# Altium PCB PCB2.PcbDoc
Units mm, origin at the board's own origin, x right, y up, seen from the top; angles counter-clockwise.
Board outline 63.53 x 53.37 mm, 2 copper layers (Top Layer, Bottom Layer); 52 components, 49 nets, 157 pads, 0 vias.
Unrouted connection lines stored in the file: 1.
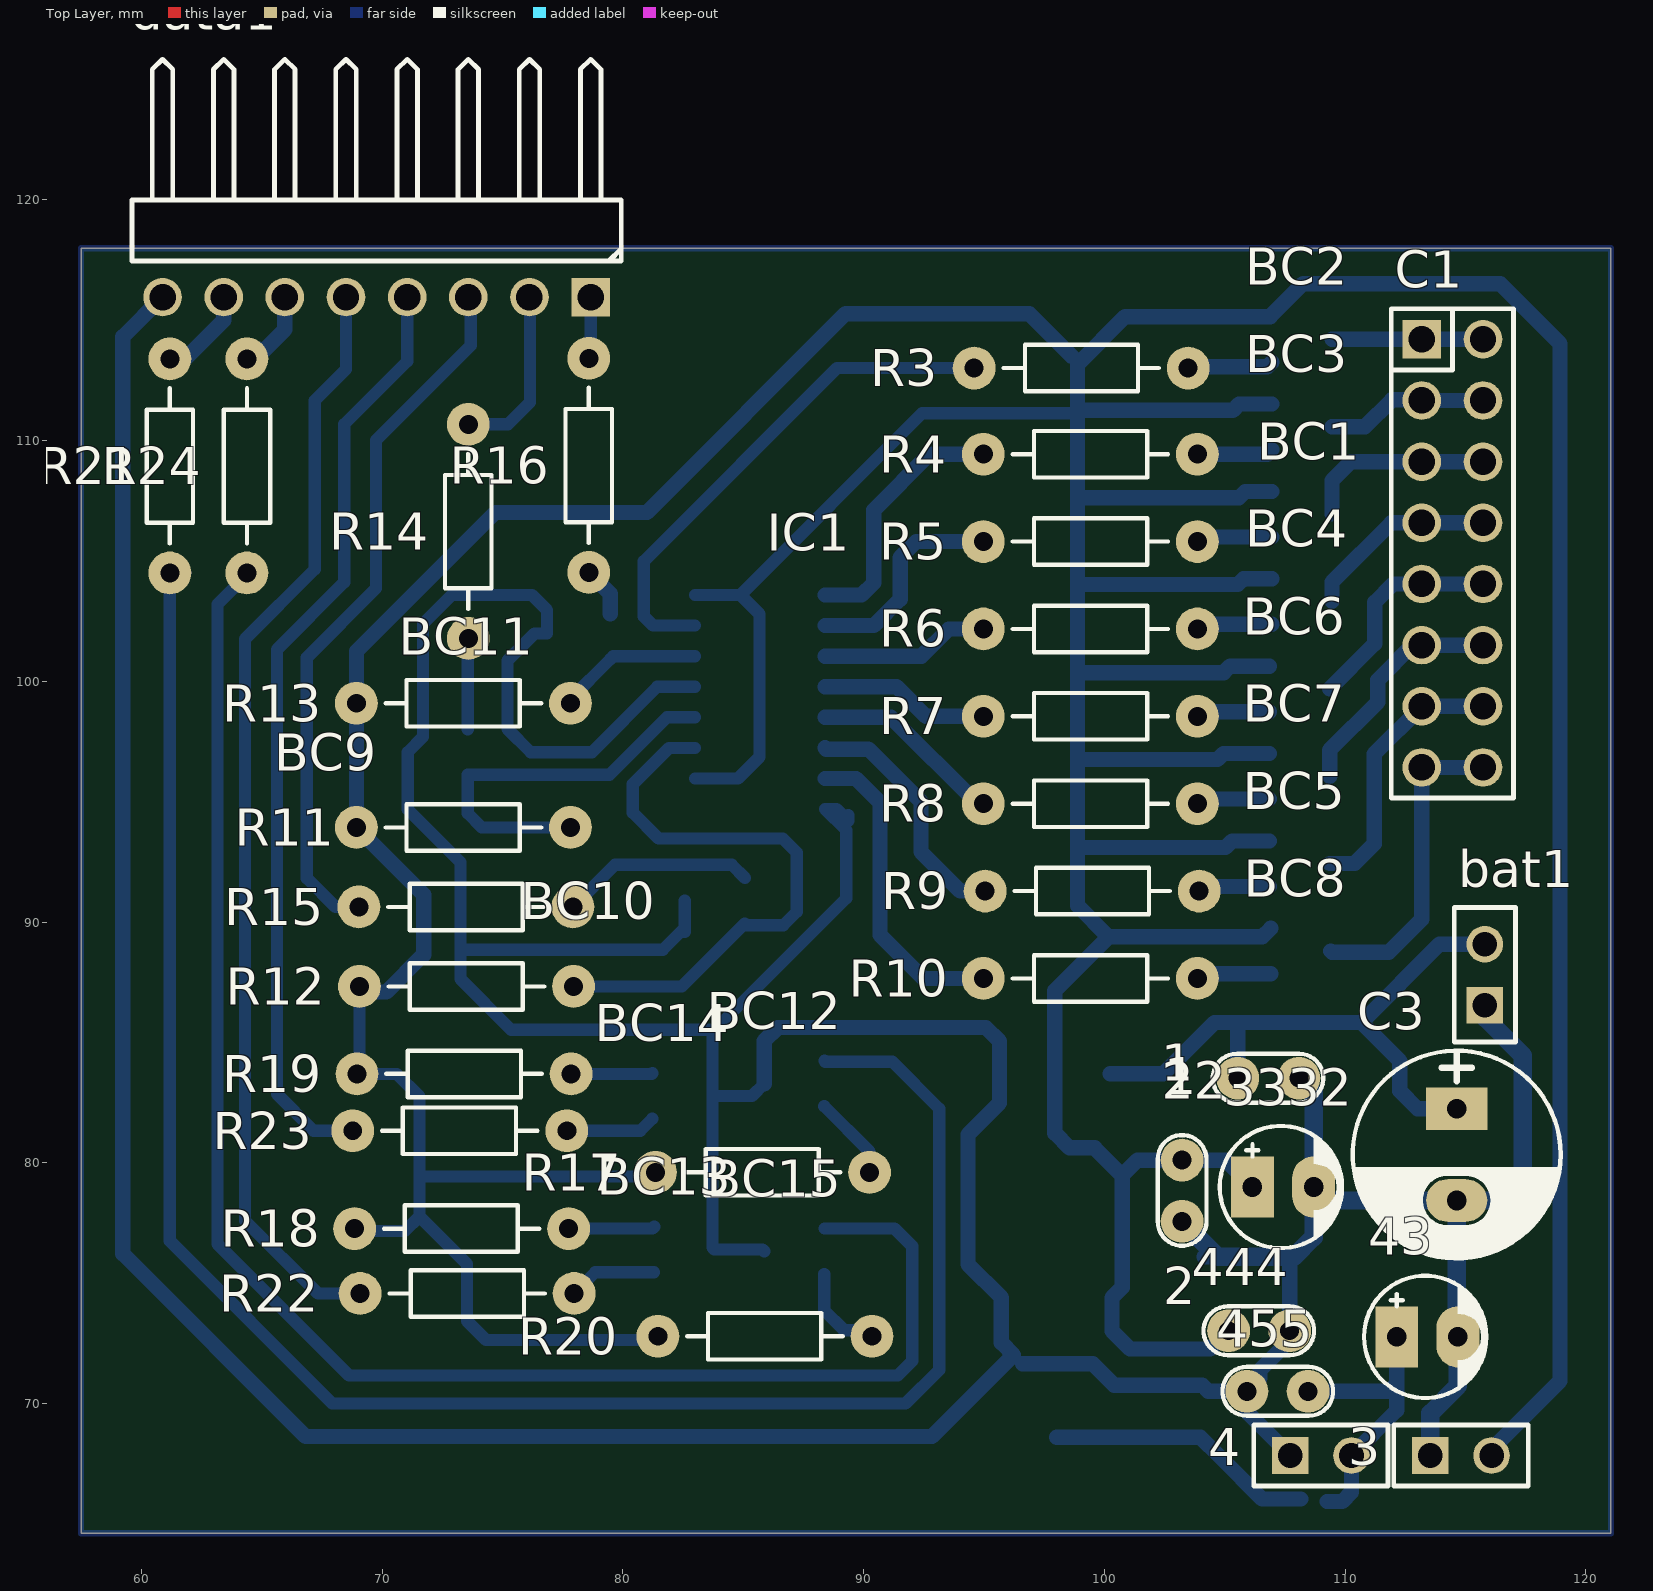
[diagram p0: Top Layer view]
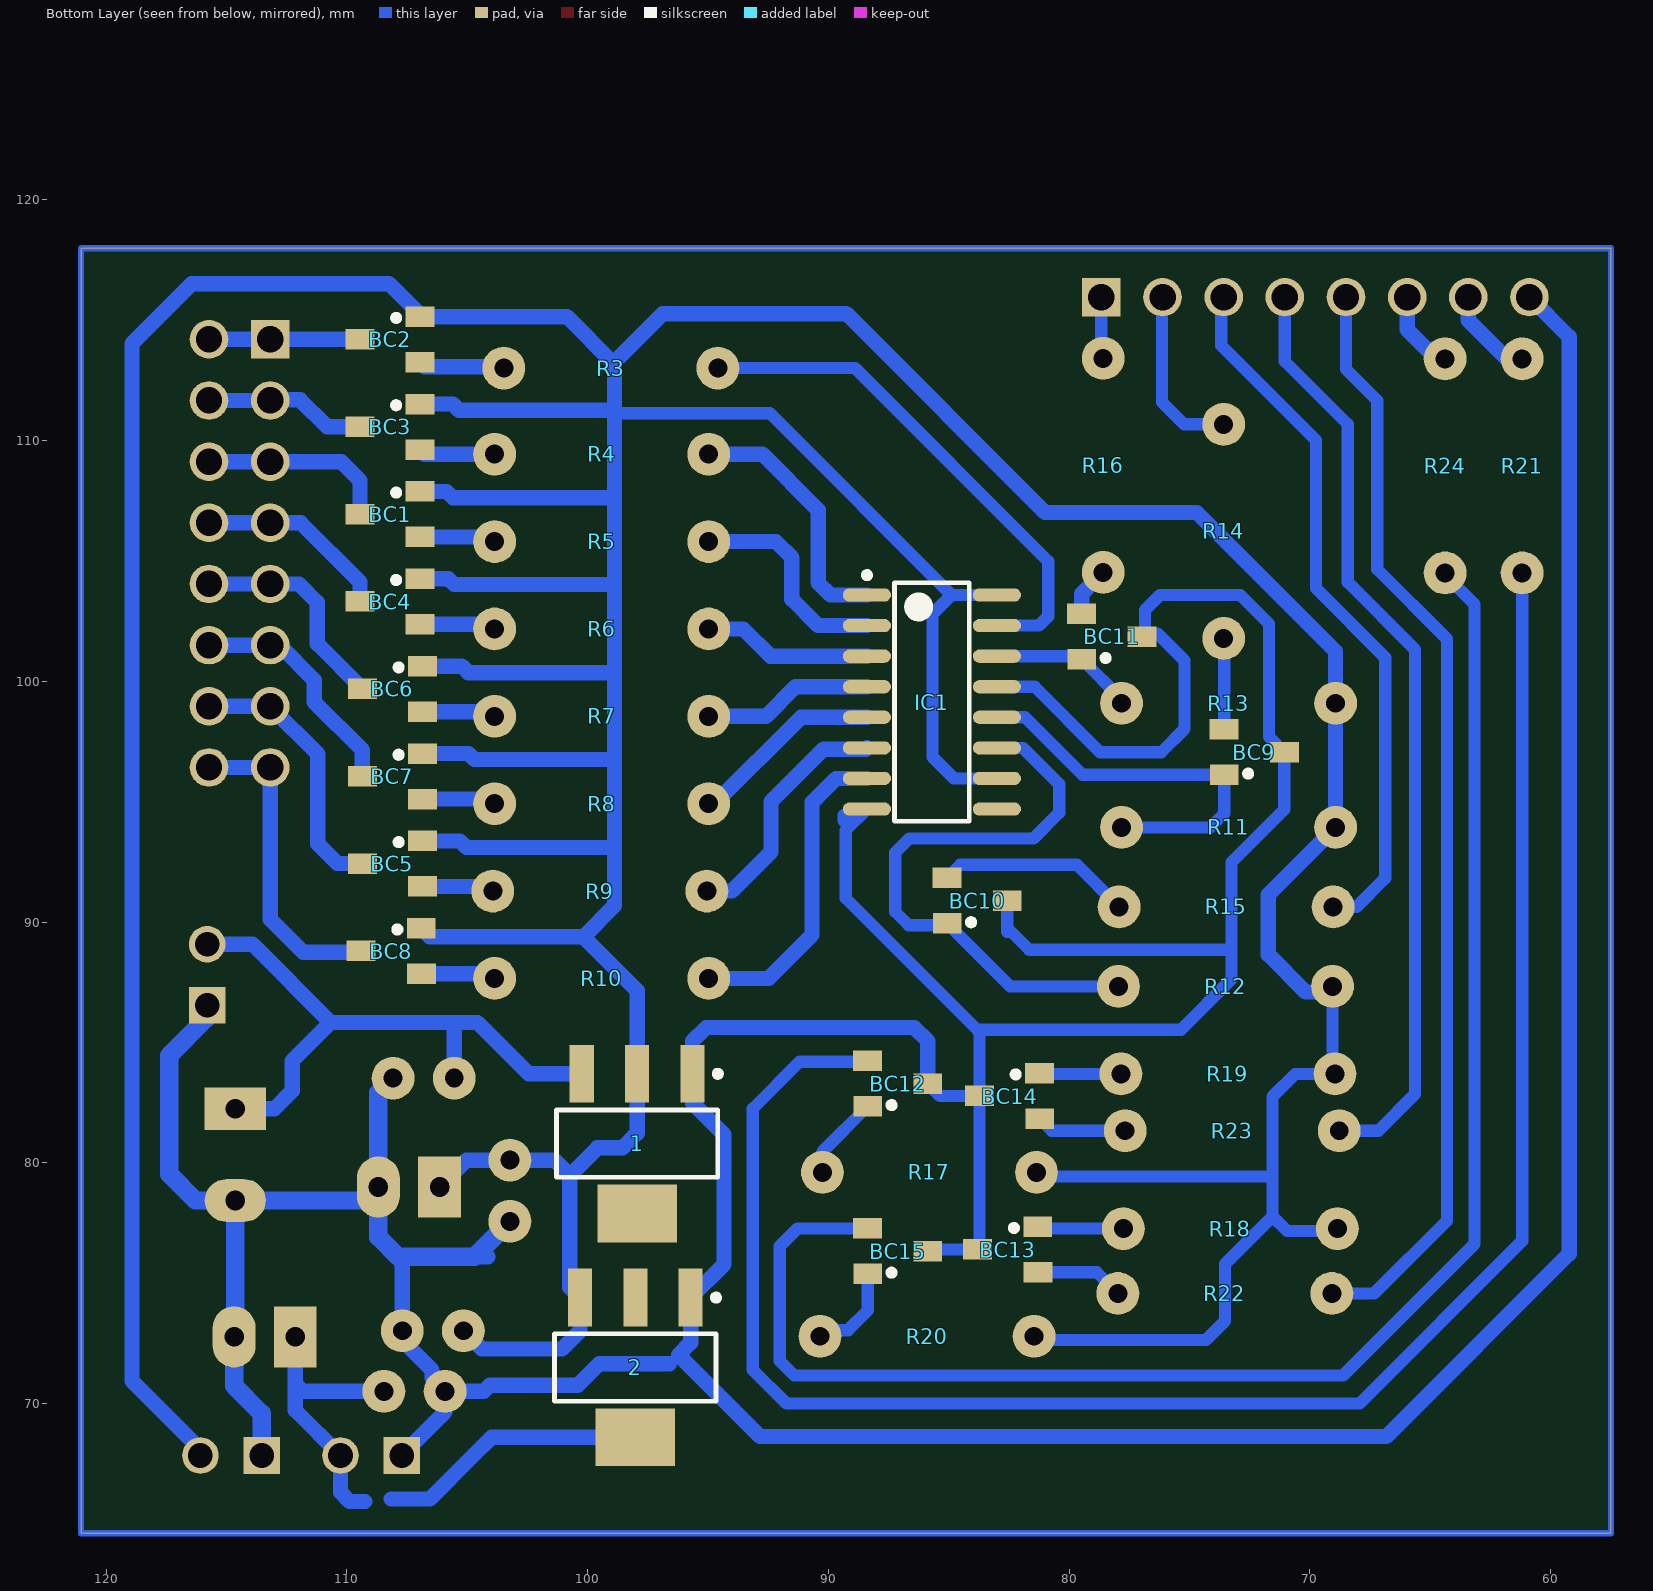
[diagram p1: Bottom Layer view, seen from below]
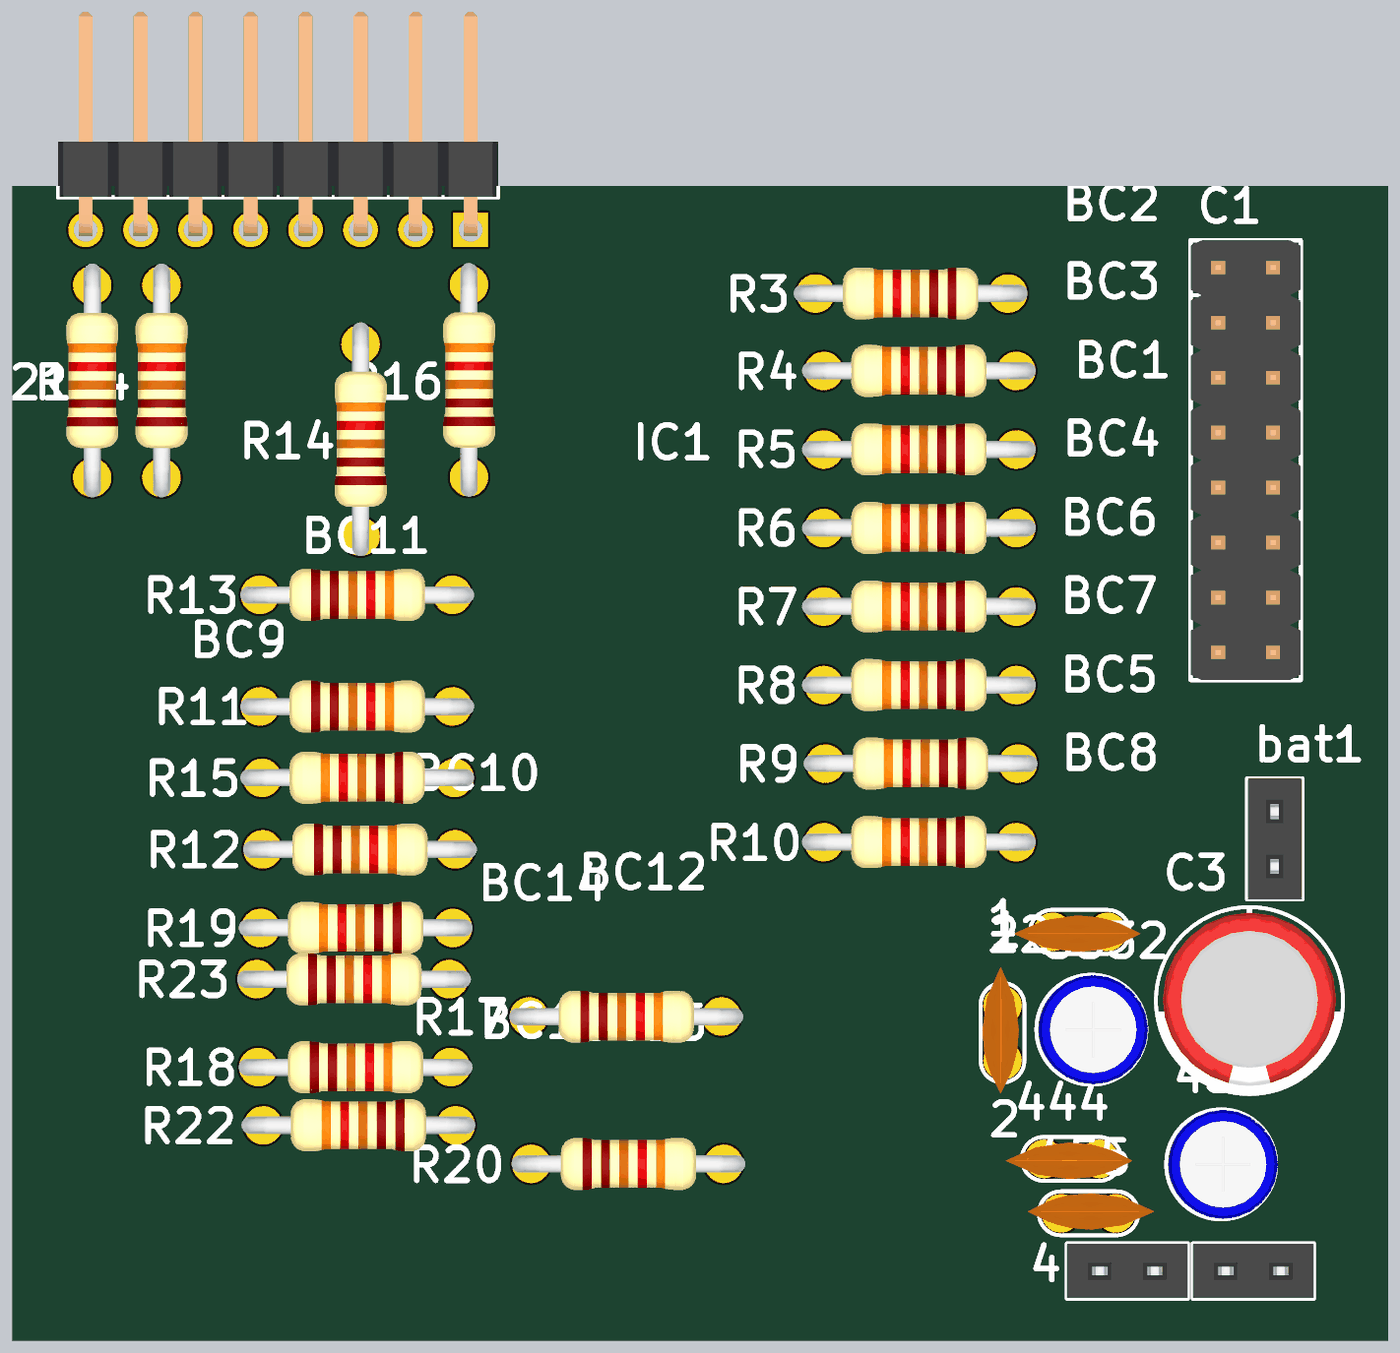
[diagram p2: 3D render of the assembled board from above, using the file's embedded part models]
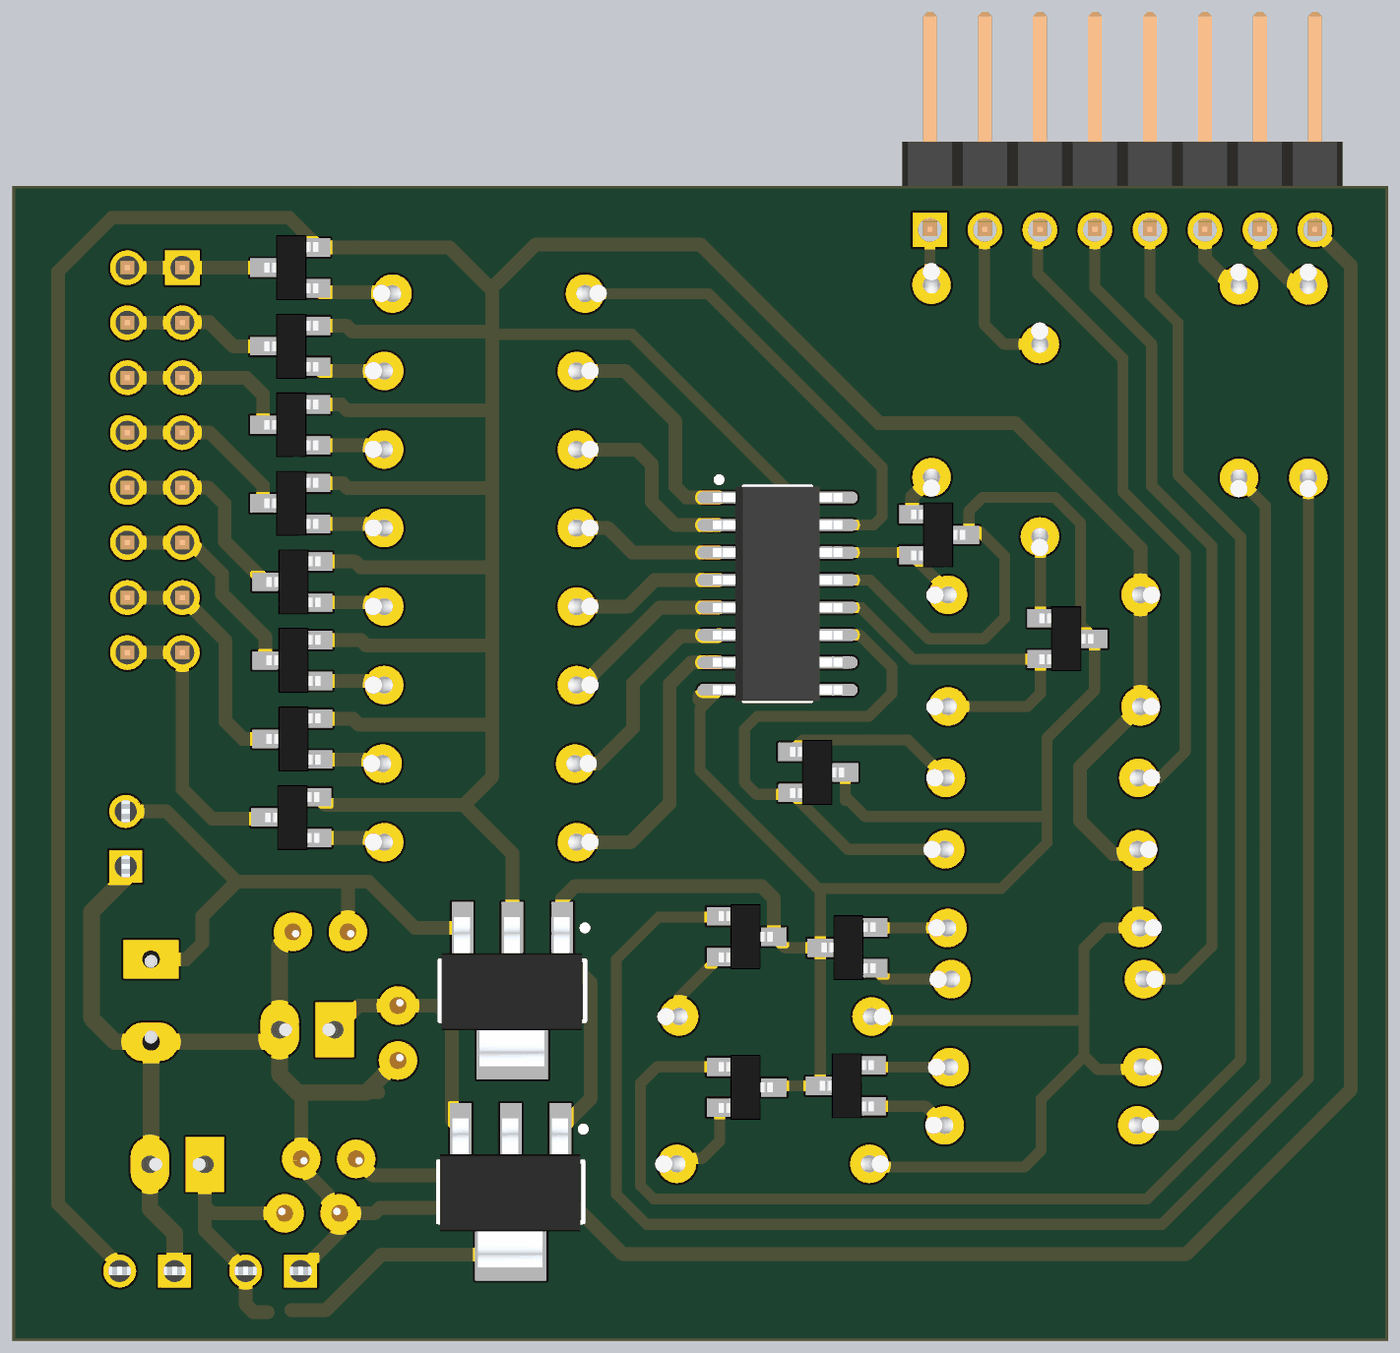
[diagram p3: 3D render of the assembled board from below, using the file's embedded part models]

## Layer stack, top to bottom
Top Solder: solder mask 0.0102, Solder Resist, Dk 3.5
Top Layer: signal copper 0.0356
Dielectric 1: dielectric 0.32, FR-4, Dk 4.8
Bottom Layer: signal copper 0.0356
Bottom Solder: solder mask 0.0102, Solder Resist, Dk 3.5

## Board outline
57.506,64.618 57.506,117.983 121.031,117.983 121.031,64.618

## Design rules (kind name [scope] priority, off if disabled: settings)
Clearance [All] p1: gap=0.254
PolygonConnect [All] p1: connectstyle=Relief reliefconductorwidth=0.254 reliefentries=4 polygonreliefangle="90 Angle" airgapwidth=0.254
RoomDefinition Sheet1 [InComponentClass('Sheet1')] p1: confinementstyle=ConfineIn formatcopy=TRUE lockcomponents=FALSE outline 178.943,26.924 273.812,26.924 273.812,50.292 178.943,50.292
RoutingVias [All] p1: holewidth=0.711 width=1.27 viastyle="Through Hole" minholewidth=0.711 minwidth=1.27 maxholewidth=0.711 maxwidth=1.27
SolderMaskExpansion [All] p1: expansion=0.102
UnpouredPolygon [All] p1: allowunpoured=FALSE
Width [All] p1: maxlimit=1.27 minlimit=0.254 preferedwidth=0.508
29 further rules are at their usual default settings.

## Components (designator, comment, footprint, x,y, rotation, side; value= is the part's Value field where it differs from the comment)
1 "LM1117" SOT223-4N 97.942,80.797 r270 bottom
1 "100pF" CN1 108.077,83.515 r180 top
2 "LM1117" SOT223-4N 98.019,71.501 r270 bottom
3 "JP2" JP2-C1T 113.538,67.843 r0 top
4 "JP2" JP2-C1T 107.721,67.843 r0 top
22 "100pF" CN1 103.226,77.572 r90 top
43 "10uF" CP1/2 112.141,72.771 r0 top
444 "100pF" CN1 107.696,73.025 r180 top
455 "100pF" CN1 105.918,70.51 r0 top
3332 "10uF" CP1/2 106.147,78.994 r0 top
bat1 "JP2" JP2-C1T 115.799,86.538 r90 top
BC1 "A1015" SOT23B 108.204,106.941 r90 bottom
BC2 "A1015" SOT23B 108.204,114.198 r90 bottom
BC3 "A1015" SOT23B 108.204,110.57 r90 bottom
BC4 "A1015" SOT23B 108.204,103.313 r90 bottom
BC5 "A1015" SOT23B 108.102,92.427 r90 bottom
BC6 "A1015" SOT23B 108.102,99.684 r90 bottom
BC7 "A1015" SOT23B 108.102,96.056 r90 bottom
BC8 "A1015" SOT23B 108.153,88.798 r90 bottom
BC9 "A1015" SOT23B 72.314,97.053 r270 bottom
BC10 "A1015" SOT23B 83.82,90.881 r270 bottom
BC11 "A1015" SOT23B 78.232,101.854 r270 bottom
BC12 "A1015" SOT23B 87.122,83.287 r270 bottom
BC13 "A1015" SOT23B 82.55,76.403 r90 bottom
BC14 "A1015" SOT23B 82.474,82.779 r90 bottom
BC15 "A1015" SOT23B 87.122,76.327 r270 bottom
C1 "JP8x2" JP8-D2T 114.452,105.308 r270 top
C3 "100uF/35V" CP1.5/3.4 114.63,82.245 r270 top
data1 "JP8" JP8-D1C 59.614,118.491 r180 top
IC1 "74HC595" SO16 85.7,99.136 r180 bottom
R3 "680" R1/4W 94.59,113.005 r0 bottom
R4 "680" R1/4W 94.971,109.428 r0 bottom
R5 "680" R1/4W 94.971,105.8 r0 bottom
R6 "680" R1/4W 94.971,102.171 r0 bottom
R7 "680" R1/4W 94.971,98.543 r0 bottom
R8 "680" R1/4W 94.971,94.914 r0 bottom
R9 "680" R1/4W 95.047,91.285 r0 bottom
R10 "680" R1/4W 94.971,87.657 r0 bottom
R11 "680" R1/4W 77.826,93.929 r180 bottom
R12 "680" R1/4W 77.953,87.325 r180 bottom
R13 "680" R1/4W 77.826,99.085 r180 bottom
R14 "680" R1/4W 73.584,110.668 r270 bottom
R15 "680" R1/4W 69.037,90.627 r0 bottom
R16 "680" R1/4W 78.588,113.411 r270 bottom
R17 "680" R1/4W 90.246,79.604 r180 bottom
R18 "680" R1/4W 77.749,77.267 r180 bottom
R19 "680" R1/4W 68.961,83.693 r0 bottom
R20 "680" R1/4W 90.348,72.796 r180 bottom
R21 "680" R1/4W 61.189,113.386 r270 bottom
R22 "680" R1/4W 69.088,74.574 r0 bottom
R23 "680" R1/4W 77.673,81.331 r180 bottom
R24 "680" R1/4W 64.389,113.386 r270 bottom

## Footprints (in the part's own frame and the unit in brackets; to place one, negate y for a bottom-side part, rotate by r counter-clockwise, add the part's x,y. Pads: shape width x height; smd on the part's side, far side on the other; paste and mask are expansions set on the pad)
CN1 [mil]
  round 70 hole 31: 1(0,0) 2(100,0)
  silkscreen extent -40,-40 141,40, body extent -60,-30 170,37, height 265
CP1.5/3.4 [mil] "Tu hoa 220->470uF,16V, 470uF/16V,25V"
  rect 70x100 hole 32: 1(0,0)
  oval 70x100 hole 32: 2(150,0)
  silkscreen extent -95,-170 245,170, body extent -85,-157 230,157, height 446
CP1/2 [mil] "Tu hoa < 22uF/16>50V"
  rect 70x100 hole 32: 1(0,0)
  oval 70x100 hole 32: 2(100,0)
  silkscreen extent -53,-100 147,100, body extent -49,-99 149,99, height 287
JP2-C1T [mm] "2 row, straight, gold plating"
  rect 1.52x1.52 hole 1.02: 1(0,0)
  round 1.52 hole 1.02: 2(2.54,0)
  silkscreen extent -1.52,-1.27 4.06,1.27, body extent -1.52,-1.25 4.06,1.25, height 8.51
JP8-D1C [mm] "8 pins, 1 row, right angled, gold plating"
  rect 1.6x1.6 hole 1.1: 1(-19.05,2.54)
  round 1.6 hole 1.1: 2(-16.51,2.54) 3(-13.97,2.54) 4(-11.43,2.54) 5(-8.89,2.54) 6(-6.35,2.54) 7(-3.81,2.54) 8(-1.27,2.54)
  silkscreen extent -20.32,-7.34 0,1.04, body extent -20.32,-7.52 0,2.84, height 2.55
JP8-D2T [mm] "16 pins, dual pin, straight, gold plating"
  rect 1.6x1.6 hole 1.1: 1(-8.89,-1.27)
  round 1.6 hole 1.1: 2(-6.35,-1.27) 3(-3.81,-1.27) 4(-1.27,-1.27) 5(1.27,-1.27) 6(3.81,-1.27) 7(6.35,-1.27) 8(8.89,-1.27) 9(8.89,1.27) 10(6.35,1.27) 11(3.81,1.27) 12(1.27,1.27) 13(-1.27,1.27) 14(-3.81,1.27) 15(-6.35,1.27) 16(-8.89,1.27)
  silkscreen extent -10.16,-2.54 10.16,2.54, body extent -10.16,-2.54 10.16,2.54, height 8.55
R1/4W [mil] "R 1/4W, 2 Pin, 350mil"
  round 70 hole 31: 1(0,0) 2(350,0)
  body extent -40,-47 386,47, height 111
SO16 [mm] "SOIC, 16-Leads, Body 9.90x3.91mm, Pitch 1.27mm, IPC Medium Density"
  oval 2x0.55 smd: 1(-2.7,4.445) 2(-2.7,3.175) 3(-2.7,1.905) 4(-2.7,0.635) 5(-2.7,-0.635) 6(-2.7,-1.905) 7(-2.7,-3.175) 8(-2.7,-4.445) 9(2.7,-4.445) 10(2.7,-3.175) 11(2.7,-1.905) 12(2.7,-0.635) 13(2.7,0.635) 14(2.7,1.905) 15(2.7,3.175) 16(2.7,4.445)
  silkscreen extent -2.83,-4.95 1.55,5.39, body extent -3,-4.95 3,4.95, height 1.4
SOT23B [mm] "SOT 23B"
  rect 0.85x1.2 smd: 1(0.94,-1.245) 2(0,1.25) 3(-0.95,-1.25)
  silkscreen extent 0.77,-0.38 1.02,-0.13, body extent -1.5,-1.3 1.5,1.2, height 1.06
SOT223-4N [mm] "SOT223, 4-Leads, Body 6.5x3.5mm, Pitch 2.3mm, Lead Span 7mm, IPC Medium Density"
  rect 2.4x1 smd: 1(-2.9,2.3) 2(-2.9,0) 3(-2.9,-2.3)
  rect 2.4x3.3 smd: 4(2.9,0)
  silkscreen extent -3.02,-3.35 1.4,3.47, body extent -3.39,-3.27 3.5,3.23, height 1.72

## Part data
1 2: "Available in 1.8V, 2.5V, 2.85V, 3.3V, 5V, and  Adjustable Versions"
1 22 444 455: library part CN1, "Cap np  1pF - 472pF"
3 4 bat1 data1: "WR-PHD 2.54 mm Angled Socket Header"
43 3332: library part CP1, "Cap P  0,1uF < 22uF , 16 - 50V"
BC1 BC2 BC3 BC4 BC5 BC6 BC7 BC8 BC9 BC10 BC11 BC12 BC13 BC14 BC15: "PNP 600mW, ECB"
C1: "WR-PHD 2.54 mm Dual Socket Header"
C3: library part CP3, "Cap 100uF/35V - 470uF/16V"
IC1: library part 74595, "8 Bit Serial input - Parallel Output"
R3 R4 R5 R6 R7 R8 R9 R10 R11 R12 R13 R14 R15 R16 R17 R18 R19 R20 R21 R22 R23 R24: library part R1/4W, "Resistor 1/4W"

## Nets (pads, with @x,y where several pads share a name; then routed paths per layer and width w, separated by ;. In a path a pad name is that pad's centre, name@x,y a point inside that pad or via, vN(x,y) a via of type N, cw(c..) or ccw(c..) an arc to the next point about the centre after c; other vN are vias at no path point)
3V3: 2.2 4.2 43.1 455.2 | length 12.2
  Bottom Layer w0.635: 455.2 111.811,70.51 112.141,70.841 ; 109.245,65.938 109.88,65.938 110.261,66.319 4.2 112.141,69.723 112.141,70.841 ; 43.1 112.141,70.841
5V: 1.2@97.942,83.697 2.3 3.2 22.2 444.2 3332.1 BC1.1 BC2.1 BC3.1 BC4.1 BC5.1 BC6.1 BC7.1 BC8.1 IC1.10 IC1.16 R11.2 R12.2 R13.2 R17.2 R18.2 R19.1 R20.2 | length 301.2
  Bottom Layer w0.508: R18.2 68.961,77.165 70.942,77.165 71.552,77.775 ; R12.2 69.063,83.795 R19.1 70.612,83.693 71.552,82.753 71.552,79.426 ; R17.2 81.178,79.426 71.552,79.426 ; R20.2 81.305,72.644 74.32,72.644 73.533,73.431 73.533,75.794 71.552,77.775 ; IC1.10 84.785,95.961 85.674,96.85 85.674,102.794 84.887,103.581 ; IC1.16 84.887,103.581 ; 98.882,111.125 92.431,111.125 84.887,103.581 ; 71.552,77.775 71.552,79.426
  Bottom Layer w0.635: R12.2 69.291,87.097 70.18,87.097 71.73,88.646 71.73,91.135 R11.2 R13.2 68.936,101.244 74.701,107.01 81.001,107.01 89.256,115.265 96.876,115.265 98.641,113.5 ; 444.2 104.394,72.263 101.067,72.263 100.319,73.011 2.3 100.736,74.819 100.736,79.477 ; 3332.1 105.029,80.112 22.2 101.371,80.112 100.736,79.477 ; BC5.1 105.305,93.367 105.029,93.091 98.882,93.091 ; BC7.1 104.946,96.995 104.699,96.749 98.908,96.749 98.882,96.774 ; BC6.1 105.221,100.624 104.953,100.355 98.908,100.355 98.882,100.381 ; BC8.1 106.553,89.383 100.178,89.383 ; BC4.1 105.776,104.252 105.537,104.013 98.882,104.013 ; BC1.1 105.849,107.881 105.588,107.62 98.958,107.62 98.882,107.544 ; BC3.1 105.591,111.51 105.334,111.252 99.009,111.252 98.882,111.125 ; 3.2 116.078,68.097 118.923,70.942 118.923,114.021 116.434,116.51 108.255,116.51 106.883,115.138 100.863,115.138 98.882,113.157 98.882,111.125 ; 98.882,93.091 98.882,90.678 100.178,89.383 ; 98.882,93.091 98.882,96.774 ; 98.882,96.774 98.882,100.381 ; 98.882,100.381 98.882,104.013 ; 98.882,104.013 98.882,107.544 ; 98.882,107.544 98.882,111.125 ; 100.178,89.383 97.942,87.147 97.942,83.697 97.942,81.229 98.552,80.62 99.593,80.62 100.736,79.477
CLKREDGREEN: BC14.1 R19.2 | length 3.4
  Bottom Layer w0.508: R19.2 81.204,83.693 BC14.1
CLKREDGREEN3V3: data1.4 R23.2 | length 39.1
  Bottom Layer w0.508: R23.2 67.158,81.331 65.634,82.855 65.634,101.321 68.428,104.115 68.428,110.668 71.044,113.284 data1.4
CLKSCAN: BC10.1 IC1.11 R12.1 | length 25
  Bottom Layer w0.508: R12.1 82.448,87.325 BC10.1 85.141,89.865 86.665,89.865 87.224,90.424 87.224,92.888 86.639,93.472 81.483,93.472 80.416,94.539 80.416,95.733 81.915,97.231 IC1.11
CLKSCAN3V3: data1.3 R15.1 | length 29.6
  Bottom Layer w0.508: R15.1 68.072,90.627 66.878,91.821 66.878,100.99 69.748,103.861 69.748,110.007 73.685,113.944 73.685,115.849 data1.3
DSGR: BC12.1 R17.1 | length 3.5
  Bottom Layer w0.508: BC12.1 90.246,80.467 R17.1
DSGR3V3: data1.7 R21.1 | length 3.9
  Bottom Layer w0.635: R21.1 61.824,113.386 63.424,114.986 data1.7
DSRED: BC15.1 R20.1 | length 3.9
  Bottom Layer w0.508: BC15.1 88.367,73.863 89.179,73.05 90.094,73.05 R20.1
DSRED3V3: data1.6 R24.1 | length 3.7
  Bottom Layer w0.635: R24.1 64.516,113.386 64.745,113.614 64.745,113.64 R24.1@64.897,113.792 ; R24.1@64.948,113.335 64.948,113.589 65.964,114.605 data1.6
DSSCAN: BC11.1 IC1.14 R13.1 | length 6.1
  Bottom Layer w0.508: R13.1 77.826,99.263 BC11.1 79.604,101.041 IC1.14
DSSCAN3V3: data1.1 R16.1 | length 2.6
  Bottom Layer w0.508: R16.1 78.664,113.487 data1.1
GND: 1.1 2.1 3.1 4.1 22.1 43.2 444.1 455.1 3332.2 bat1.1 BC9.2 BC10.2 BC11.2 BC12.2 BC13.2 BC14.2 BC15.2 C3.2 data1.8 IC1.8 IC1.13 | length 256.2
  Bottom Layer w0.508: 73.254,88.849 81.661,88.849 82.57,89.758 ; 82.57,89.591 BC10.2 ; IC1.13 81.432,99.771 78.715,97.053 76.175,97.053 75.209,98.019 75.209,100.863 76.327,101.981 76.855,101.981 76.855,102.952 76.225,103.581 72.898,103.581 71.704,102.387 71.704,97.694 BC9.2 71.064,94.671 73.254,92.481 73.254,87.63 75.362,85.522 83.82,85.522 ; BC15.2 85.796,76.403 BC13.2 83.724,76.479 BC14.2 ; BC12.2 85.364,82.779 BC14.2 ; 89.357,94.437 89.357,94.209 88.875,94.691 IC1.8 89.281,93.81 89.281,90.983 83.82,85.522 ; BC14.2 83.724,85.426 83.82,85.522
  Bottom Layer w0.635: data1.8 59.233,114.3 59.233,76.225 66.827,68.631 92.837,68.631 96.228,72.022 95.719,72.531 2.1 94.336,75.784 94.336,81.178 95.642,82.485 95.642,83.697 95.642,85.053 95.072,85.623 86.436,85.623 85.872,85.059 BC12.2 ; 96.596,71.653 99.517,71.653 100.406,70.764 104.064,70.764 104.318,70.51 455.1 ; 104.14,76.098 104.699,76.098 ; 4.1 105.918,69.647 455.1 ; 107.874,76.098 107.696,75.921 444.1 107.696,72.619 106.464,71.387 106.464,71.056 455.1
  Bottom Layer w0.762: 22.1 104.699,76.098 107.874,76.098 108.687,76.911 3332.2 ; 1.1@108.077,83.515 108.687,82.906 3332.2 ; 3.1 113.538,69.596 114.681,70.739 43.2 114.63,72.822 C3.2 ; bat1.1 115.799,86.03 117.373,84.455 117.373,79.527 116.281,78.435 C3.2 ; 3332.2 109.245,78.435 C3.2
INPUT1: IC1.15 R3.1 | length 21.6
  Bottom Layer w0.508: IC1.15 81.255,102.311 80.874,102.692 80.874,104.978 88.9,113.005 R3.1
INPUT2: IC1.1 R4.1 | length 10.8
  Bottom Layer w0.635: IC1.1 89.916,103.581 90.424,104.089 90.424,107.112 92.74,109.428 R4.1
INPUT3: IC1.2 R5.1 | length 9
  Bottom Layer w0.635: IC1.2 90.424,102.311 91.516,103.403 91.516,105.131 92.185,105.8 R5.1
INPUT4: IC1.3 R6.1 | length 7
  Bottom Layer w0.635: IC1.3 92.405,101.041 93.535,102.171 R6.1
INPUT5: IC1.4 R7.1 | length 7.1
  Bottom Layer w0.635: IC1.4 91.364,99.771 92.592,98.543 R7.1
INPUT6: IC1.5 R8.1 | length 8.1
  Bottom Layer w0.635: IC1.5 91.135,98.501 94.722,94.914 R8.1
INPUT7: IC1.6 R9.1 | length 10.3
  Bottom Layer w0.635: IC1.6 88.45,97.18 90.195,97.18 92.38,94.996 92.38,92.913 94.008,91.285 R9.1
INPUT8: IC1.7 R10.1 | length 13.2
  Bottom Layer w0.635: IC1.7 89.687,95.961 90.678,94.971 90.678,89.459 92.48,87.657 R10.1
LATREDGREEN: BC13.1 R18.1 | length 3.6
  Bottom Layer w0.508: R18.1 81.229,77.267 BC13.1
LATREDGREEN3V3: data1.5 R22.1 | length 46.1
  Bottom Layer w0.508: data1.5 68.504,112.954 67.208,111.658 67.208,104.648 64.313,101.752 64.313,77.597 67.335,74.574 R22.1
LATSCAN: BC9.1 IC1.12 R11.1 | length 16.5
  Bottom Layer w0.508: R11.1 74.143,93.929 73.558,94.513 BC9.1 79.451,96.114 81.839,98.501 IC1.12
LATSCAN3V3: data1.2 R14.1 | length 7.3
  Bottom Layer w0.508: R14.1 75.235,110.668 76.149,111.582 76.149,115.926 data1.2
NetBC1_3: BC1.3 R5.2 | length 3.2
  Bottom Layer w0.635: R5.2 104.052,105.991 BC1.3
NetBC2_3: BC2.3 R3.2 | length 3.2
  Bottom Layer w0.635: R3.2@103.861,113.057 106.762,113.057 BC2.3
NetBC3_3: BC3.3 R4.2 | length 3.2
  Bottom Layer w0.635: R4.2 106.762,109.428 BC3.3
NetBC4_3: BC4.3 R6.2 | length 3.2
  Bottom Layer w0.635: R6.2 104.052,102.363 BC4.3
NetBC5_3: BC5.3 R9.2 | length 3
  Bottom Layer w0.635: R9.2 104.128,91.477 BC5.3
NetBC6_3: BC6.3 R7.2 | length 3.1
  Bottom Layer w0.635: R7.2 104.052,98.734 BC6.3
NetBC7_3: BC7.3 R8.2 | length 3.1
  Bottom Layer w0.635: R8.2 104.052,95.106 BC7.3
NetBC8_3: BC8.3 R10.2 | length 3.1
  Bottom Layer w0.635: R10.2 104.052,87.848 BC8.3
NetBC9_3: BC9.3 R14.2 | length 3.8
  Bottom Layer w0.508: BC9.3 73.564,101.758 R14.2
NetBC10_3: BC10.3 R15.2 | length 8.1
  Bottom Layer w0.508: R15.2 79.68,92.38 84.521,92.38 BC10.3
NetBC11_3: BC11.3 R16.2 | length 2.1
  Bottom Layer w0.635: R16.2 79.482,103.627 BC11.3
NetBC12_3: BC12.3 R21.2 | length 79.8
  Bottom Layer w0.508: R21.2@61.824,104.496 61.189,103.861 61.189,76.748 67.934,70.002 91.745,70.002 93.142,71.399 93.142,82.245 91.186,84.201 88.408,84.201 BC12.3
NetBC13_3: BC13.3 R22.2 | length 3.7
  Bottom Layer w0.508: R22.2 78.857,75.453 BC13.3
NetBC14_3: BC14.3 R23.1 | length 3.8
  Bottom Layer w0.508: R23.1 80.726,81.331 BC14.3
NetBC15_3: BC15.3 R24.2 | length 68.9
  Bottom Layer w0.508: R24.2@64.948,104.445 64.414,104.445 63.17,103.2 63.17,76.632 68.631,71.171 91.415,71.171 92.024,71.78 92.024,76.53 91.277,77.277 BC15.3
POWER: 1.2@105.537,83.515 1.3 bat1.2 C3.1 | length 26.3
  Bottom Layer w0.635: 1.3 102.443,83.697 104.572,85.827 105.486,85.827 ; 1.2@105.537,83.515 105.537,85.776 105.486,85.827 ; C3.1 113.005,82.245 112.268,82.982 112.268,84.226 110.668,85.827 ; bat1.2 113.919,89.078 110.668,85.827 ; 105.486,85.827 110.668,85.827
ROW1: BC2.2 C1.1 C1.16 | length 6.3
  Bottom Layer w0.635: BC2.2 C1.1 C1.16
ROW2: BC3.2 C1.2 C1.15 | length 6.7
  Bottom Layer w0.635: BC3.2 110.824,110.57 111.938,111.684 113.157,111.684 C1.2 C1.15
ROW3: BC1.2 C1.3 C1.14 | length 8
  Bottom Layer w0.635: BC1.2 109.454,108.336 110.236,109.118 C1.3 C1.14
ROW4: BC4.2 C1.4 C1.13 | length 8.1
  Bottom Layer w0.635: BC4.2 109.454,104.12 111.912,106.578 C1.4 C1.13
ROW5: BC6.2 C1.5 C1.12 | length 9.2
  Bottom Layer w0.635: BC6.2 111.227,101.558 111.227,103.276 111.989,104.038 C1.5 C1.12
ROW6: BC7.2 C1.6 C1.11 | length 9.8
  Bottom Layer w0.635: BC7.2 109.352,97.135 111.354,99.136 111.354,100.051 112.801,101.498 C1.6 C1.11
ROW7: BC5.2 C1.7 C1.10 | length 11.3
  Bottom Layer w0.635: BC5.2 110.392,92.427 111.201,93.236 111.201,96.977 C1.7 C1.10
ROW8: BC8.2 C1.8 C1.9 | length 13.2
  Bottom Layer w0.635: BC8.2 109.454,88.748 111.811,88.748 113.182,90.119 C1.8 C1.9
pads on no net: 1.4 2.4 IC1.9
copper on no net: | length 245
  Bottom Layer w0.254: 57.506,64.618 121.031,64.618 121.031,117.983 57.506,117.983 57.506,64.618
  Bottom Layer w0.635: 98.019,68.601 103.992,68.601 104.8,67.793 106.553,66.04 108.153,66.04

## Dimensions
57.506,64.618 to 121.031,64.618 on Bottom Layer
121.031,117.983 to 121.031,64.618 on Bottom Layer